# Altium PCB Main PCB.PcbDoc
Units mm, origin at the board's own origin, x right, y up, seen from the top; angles counter-clockwise.
Board outline 152.4 x 101.6 mm, 2 copper layers (Top Layer, Bottom Layer); 19 components, 17 nets, 99 pads, 4 vias.
Unrouted connection lines stored in the file: 3.
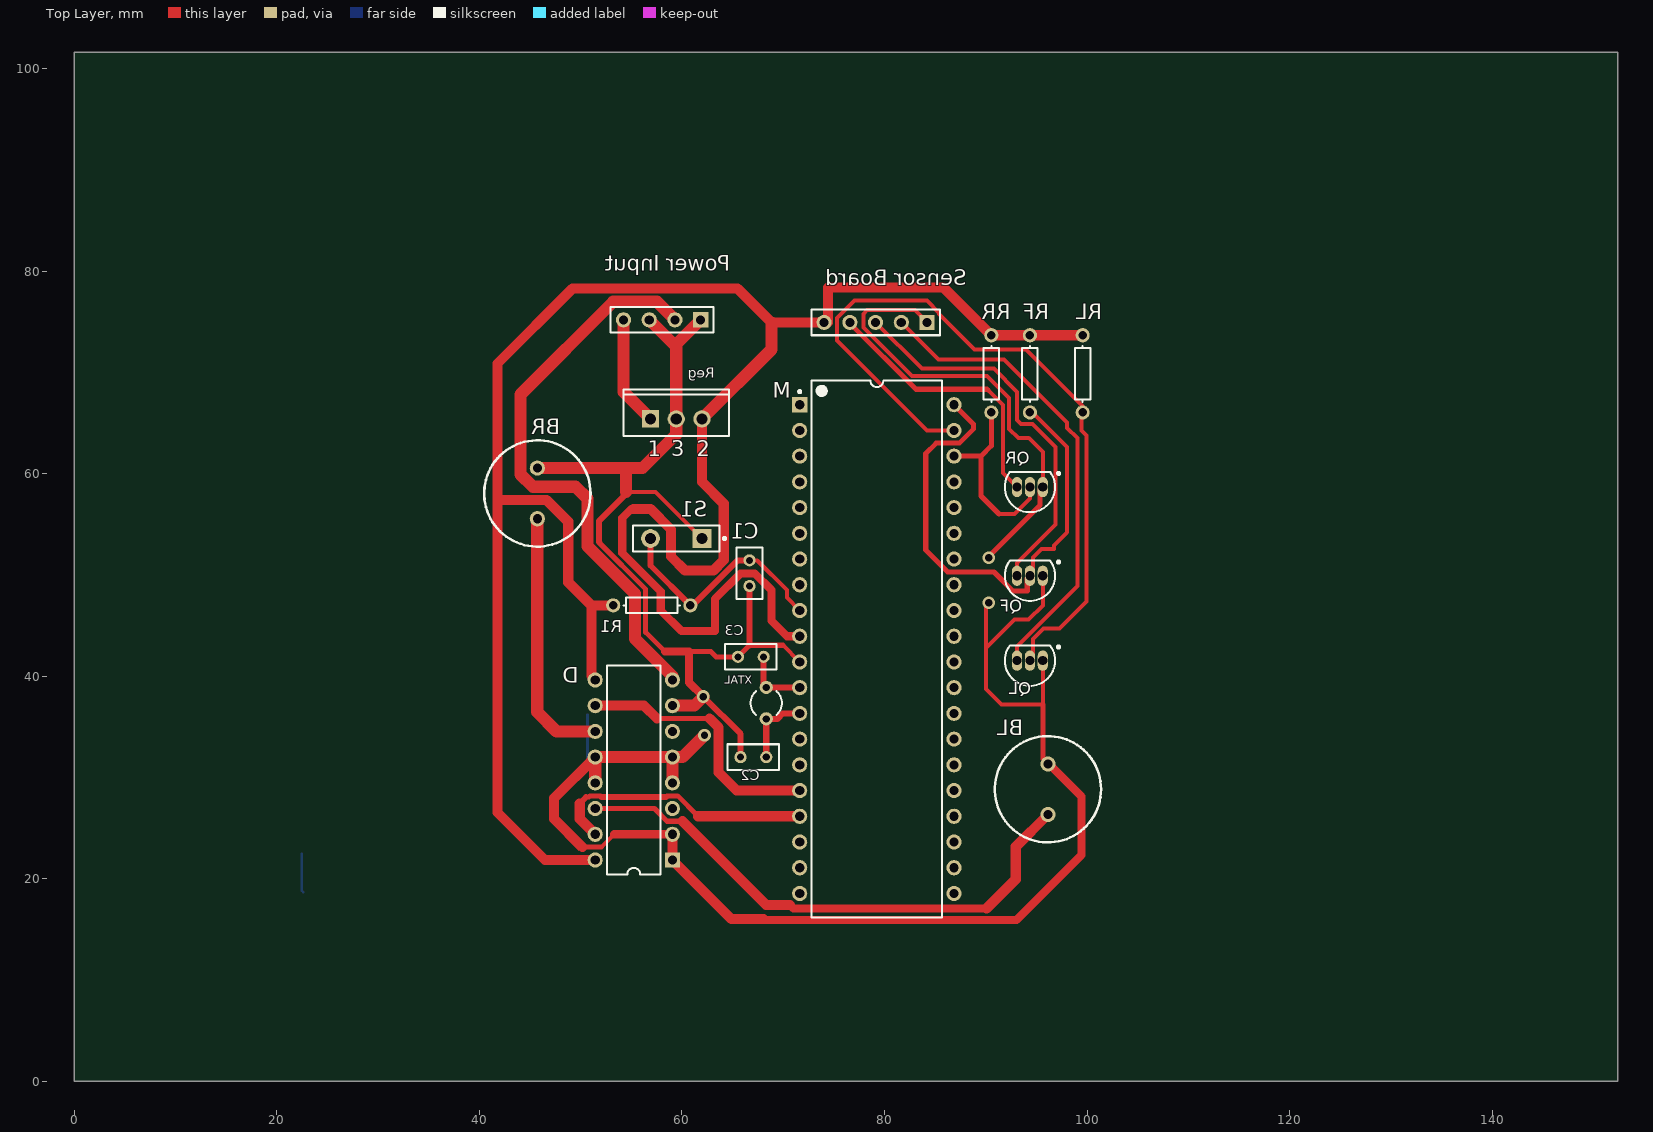
[diagram p0: Top Layer view]
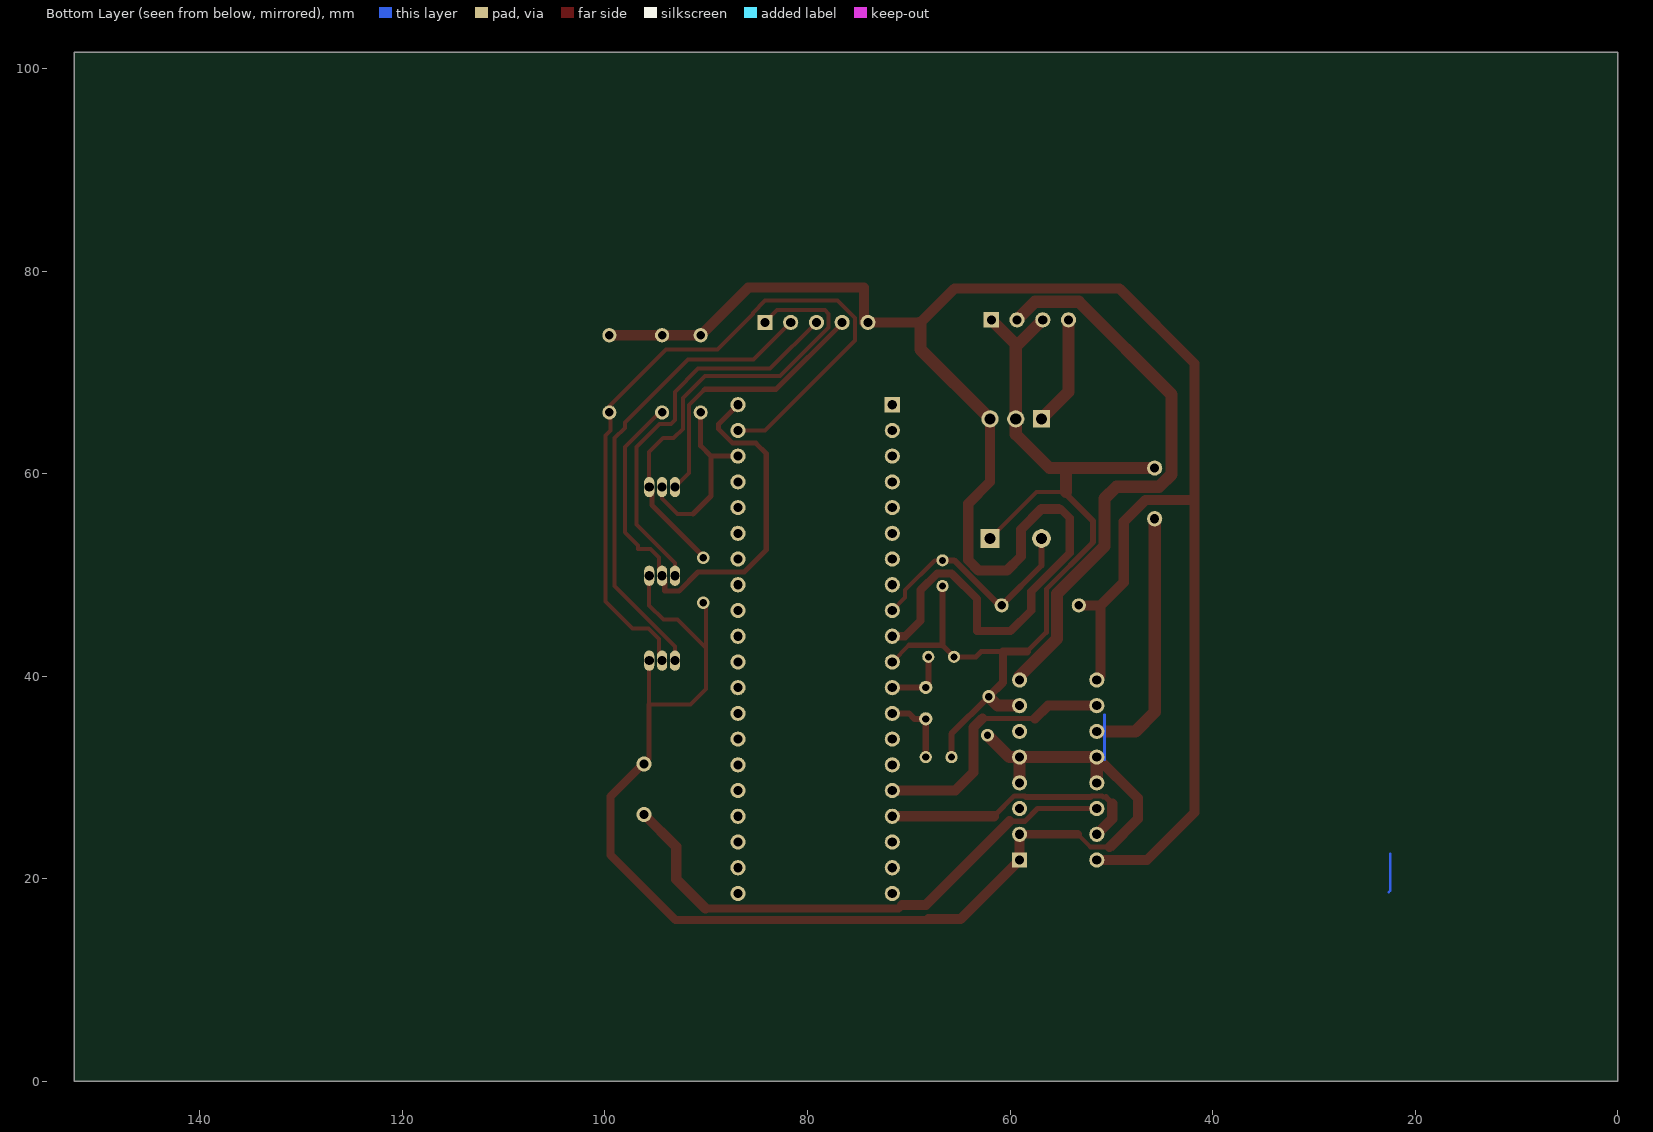
[diagram p1: Bottom Layer view, seen from below]

## Layer stack, top to bottom
Top Solder: solder mask 0.0102, Solder Resist, Dk 3.5
Top Layer: signal copper 0.0356
Dielectric 1: dielectric 0.32, FR-4, Dk 4.8
Bottom Layer: signal copper 0.0356
Bottom Solder: solder mask 0.0102, Solder Resist, Dk 3.5

## Board outline
0,0 152.4,0 152.4,101.6 0,101.6

## Design rules (kind name [scope] priority, off if disabled: settings)
Clearance [All] p1: gap=0.254 ignorepadtopadclearanceinfootprint=FALSE except(0: Arc-Hole Track-Hole SMDPad-Hole THPad-Hole Via-Hole Fill-Hole Poly-Hole Region-Hole Text-Hole; 0.2: Arc-Arc Arc-Track Track-Track)
PolygonConnect [All] p1: connectstyle=Relief reliefconductorwidth=0.254 reliefentries=4 polygonreliefangle="90 Angle" airgapwidth=0.254
RoutingVias [All] p1: holewidth=0.711 width=1.27 viastyle="Through Hole" minholewidth=0.711 minwidth=1.27 maxholewidth=0.711 maxwidth=1.27
SolderMaskExpansion [All] p1: expansion=0.102
Width [All] p1: maxlimit=1.2 minlimit=0.254 preferedwidth=0.8 toplayer_minwidth=0.4 bottomlayer_maxwidth=0.254 bottomlayer_prefwidth=0.254 minimp=50.000000 maximp=50.000000 favimp=50.000000
30 further rules are at their usual default settings.

## Classes and differential pairs
component class "Main Schematic": BR C1 D "Power Input" QF QL R1 Reg RF RL RR S1

## Components (designator, comment, footprint, x,y, rotation, side; value= is the part's Value field where it differs from the comment)
BL "Motor" RB5-10.5 96.139,28.829 r270 top
BR "Motor" RB5-10.5 45.72,58.039 r90 top
C1 "Cap" RAD-0.1 66.675,50.165 r90 top
C2 "Cap" RAD-0.1 67.056,32.004 r0 top
C3 "Cap" RAD-0.1 66.802,41.91 r0 top
D "L293D" DIP16 55.245,30.734 r90 top
M "ATmega16A-PU" 40P6 79.248,42.672 r0 top
"Power Input" "Header 4" HDR1X4 61.849,75.184 r180 top
QF "C945" TO-92A 94.361,49.911 r90 top
QL "C945" TO-92A 94.361,41.529 r90 top
QR "C945" TO-92A 94.361,58.674 r90 top
R1 "Res1" AXIAL-0.3 57.023,46.99 r180 top
Reg "L7805CV" TO220ABN 59.436,65.405 r0 top (schematic designator Regulator)
RF "Res1" AXIAL-0.3 94.361,69.85 r90 top
RL "Res1" AXIAL-0.3 99.568,69.85 r90 top
RR "Res1" AXIAL-0.3 90.551,69.85 r90 top
S1 "SW-PB" SPST-2 59.436,53.594 r180 top
"Sensor Board" "Header 5" HDR1X5 84.201,74.93 r180 top
XTAL "XTAL" R38 68.326,37.338 r180 top

## Footprints (in the part's own frame and the unit in brackets; to place one, negate y for a bottom-side part, rotate by r counter-clockwise, add the part's x,y. Pads: shape width x height; smd on the part's side, far side on the other; paste and mask are expansions set on the pad)
40P6 [mm] "DIP, 40-Leads, Row Spacing 15.24mm, Pitch 2.54mm, Body 52.2x13.95mm"
  rect 1.5x1.5 hole 0.9: 1(-7.62,24.13)
  round 1.5 hole 0.9: 2(-7.62,21.59) 3(-7.62,19.05) 4(-7.62,16.51) 5(-7.62,13.97) 6(-7.62,11.43) 7(-7.62,8.89) 8(-7.62,6.35) 9(-7.62,3.81) 10(-7.62,1.27) 11(-7.62,-1.27) 12(-7.62,-3.81) 13(-7.62,-6.35) 14(-7.62,-8.89) 15(-7.62,-11.43) 16(-7.62,-13.97) 17(-7.62,-16.51) 18(-7.62,-19.05) 19(-7.62,-21.59) 20(-7.62,-24.13) 21(7.62,-24.13) 22(7.62,-21.59) 23(7.62,-19.05) 24(7.62,-16.51) 25(7.62,-13.97) 26(7.62,-11.43) 27(7.62,-8.89) 28(7.62,-6.35) 29(7.62,-3.81) 30(7.62,-1.27) 31(7.62,1.27) 32(7.62,3.81) 33(7.62,6.35) 34(7.62,8.89) 35(7.62,11.43) 36(7.62,13.97) 37(7.62,16.51) 38(7.62,19.05) 39(7.62,21.59) 40(7.62,24.13)
  silkscreen extent -7.74,-26.5 6.45,26.5, body extent -7.05,-26.47 7.05,26.47, height 4.83
AXIAL-0.3 [mm] "Axial Device, Thru-Hole; 2 Leads; 0.3 in Pin Spacing"
  round 1.4 hole 0.85: 1(-3.81,0) 2(3.81,0)
  silkscreen extent -2.77,-0.76 2.77,0.76
DIP16 [mm] "DIP; 16 Leads; Row Spacing 7.62 mm; Pitch 2.54 mm"
  rect 1.5x1.5 hole 0.9: 1(-8.89,-3.81)
  round 1.5 hole 0.9: 2(-6.35,-3.81) 3(-3.81,-3.81) 4(-1.27,-3.81) 5(1.27,-3.81) 6(3.81,-3.81) 7(6.35,-3.81) 8(8.89,-3.81) 9(8.89,3.81) 10(6.35,3.81) 11(3.81,3.81) 12(1.27,3.81) 13(-1.27,3.81) 14(-3.81,3.81) 15(-6.35,3.81) 16(-8.89,3.81)
  silkscreen extent -10.3,-2.65 10.3,2.65
HDR1X4 [mm] "Connector; Header; 4 Position"
  rect 1.5x1.5 hole 0.9: 1(0,0)
  round 1.5 hole 0.9: 2(2.54,0) 3(5.08,0) 4(7.62,0)
  silkscreen extent -1.27,-1.27 8.89,1.27
HDR1X5 [mm] "Connector; Header; 5 Position"
  rect 1.5x1.5 hole 0.9: 1(0,0)
  round 1.5 hole 0.9: 2(2.54,0) 3(5.08,0) 4(7.62,0) 5(10.16,0)
  silkscreen extent -1.27,-1.27 11.43,1.27
R38 [mm] "Crystal, Thru-Hole; 2 Leads; Body 3.1 x 8.2 mm (Dia.xH)"
  round 1.3 hole 0.7: 1(0,1.55) 2(0,-1.55)
  silkscreen extent -1.55,-1.19 1.55,1.17
RAD-0.1 [mm] "Radial Cap, Thru-Hole; 2 Leads; 0.1 in Pin Spacing"
  round 1.2 hole 0.7: 1(-1.27,0) 2(1.27,0)
  silkscreen extent -2.54,-1.27 2.54,1.27
RB5-10.5 [mm] "Capacitor (Radial); 2 Leads"
  round 1.5 hole 0.9: 1(-2.5,0) 2(2.5,0)
  silkscreen extent -5.25,-5.25 5.25,5.25
SPST-2 [mm] "Switch; 2 Leads"
  rect 1.85x1.85 hole 1.1: 1(-2.54,0)
  round 1.85 hole 1.1: 2(2.54,0)
  silkscreen extent -4.89,-1.27 4.28,1.27
TO220ABN [mm] "TO, Thru-Hole, Vertical, Heatsink Mounted; 3 In-Line Leads; Pitch 2.54 mm; Pin sequence 1, 3, 2"
  rect 1.7x1.7 hole 1.1: 1(-2.54,0)
  round 1.7 hole 1.1: 2(2.54,0) 3(0,0)
  silkscreen extent -5.2,-1.7 5.2,2.9
TO-92A [mm] "TO, Flat Index; 3 In-Line, Axial Leads; Body Dia. 4.5mm; Leads 0.51 x 0.48 mm (max)"
  oval 2x1 hole 0.9: 1(0,-1.27) 2(0,0) 3(0,1.27)
  silkscreen extent -2.48,-2.96 1.5,2.48, body extent -2.48,-2.5 1.5,2.5, height 6.86

## Part data
BL BR: "Motor, General Kind"
C1 C2 C3: "Capacitor"
D: "Push-Pull Four Channel Driver With Diode"
M: "8-bit AVR Microcontroller, 16KB Flash, 512 Bytes EEPROM, 1KB SRAM, 40-pin PDIP, Industrial Grade (-40°C to 85°C)"
"Power Input": "Header, 4-Pin"
QF QL QR: library part 2N3904, "NPN General Purpose Amplifier"
R1 RF RL RR: "Resistor"
Reg: "Positive Voltage Regulator"
S1: "Switch"
"Sensor Board": "Header, 5-Pin"
XTAL: "Crystal Oscillator"

## Via types
v1: diameter 1.27, hole 0.711, Top Layer to Bottom Layer, 4 vias

## Nets (pads, with @x,y where several pads share a name; then routed paths per layer and width w, separated by ;. In a path a pad name is that pad's centre, name@x,y a point inside that pad or via, vN(x,y) a via of type N, cw(c..) or ccw(c..) an arc to the next point about the centre after c; other vN are vias at no path point)
+12: "Power Input.2" D.8 | length 56.6
  Top Layer w1.2: D.8 59.055,40.005 55.372,43.688 55.372,48.133 50.673,52.832 50.673,57.531 49.5,58.704 45.287,58.704 44.069,59.922 44.069,67.818 53.213,76.962 57.531,76.962 59.309,75.184
GND: "Power Input.1" "Power Input.3" "Sensor Board.1" BL.1 BR.2 C1.1 C2.1 C3.1 D.1 D.2 D.4 D.5 D.7 D.12 D.13 M.11 QF.1 QL.1 QR.1 Reg.3 S1.1 | length 284.6
  Top Layer w0.254: 59.436,72.517 59.436,72.771
  Top Layer w0.4: 52.042,23.114 53.312,24.384 ; 54.57,58.079 54.483,58.166 57.404,58.166 S1.1 ; 69.977,43.053 M.11 ; 84.201,74.93 82.997,76.134 78.293,76.134 77.917,75.758 77.917,74.431 82.717,69.631 90.135,69.631 92.305,67.461 92.305,64.413 93.218,63.5 94.246,63.5 95.631,62.115 QR.1 ; v1(90.297,47.244) 90.043,46.99 90.043,42.799 ; QL.1 95.631,37.211 91.567,37.211 90.043,38.735 90.043,42.799 ; QF.1 95.631,46.99 94.234,45.593 92.837,45.593 90.043,42.799
  Top Layer w0.5: 50.165,23.114 52.042,23.114 ; 51.816,53.188 56.422,48.582 56.422,44.335 58.339,42.418 ; 60.706,42.418 62.865,42.418 63.373,41.91 C3.1 66.675,43.053 69.977,43.053 ; v1(90.297,51.689) 90.297,51.816 95.365,56.884 95.365,58.408 QR.1 ; 95.631,37.211 95.631,31.837 BL.1
  Top Layer w0.6: 51.845,53.216 51.816,53.245 51.816,55.325 54.57,58.079 ; v1(62.103,37.973) 65.786,34.29 C2.1 ; 66.675,43.053 C1.1
  Top Layer w0.8: 53.312,24.384 D.2 ; 58.339,42.418 60.706,42.418 60.706,39.37 v1(62.103,37.973) ; 68.026,16.002 68.09,15.938 93.027,15.938 99.441,22.352 99.441,28.114 BL.1@96.183,31.373
  Top Layer w1: 50.165,23.114 47.371,25.908 47.371,27.94 D.12 ; D.2 D.1 64.897,16.002 68.026,16.002
  Top Layer w1.2: BR.2 54.483,60.539 ; D.13 D.12 D.5 ; 54.483,58.166 54.483,60.539 ; 56.769,75.184 59.436,72.517 Reg.3 59.436,63.881 56.094,60.539 54.483,60.539 ; D.4 D.5 ; D.7 61.214,37.084 v1(62.103,37.973) ; 59.436,72.771 61.849,75.184 ; v1(62.23,34.163) 60.071,32.004 D.5
  Bottom Layer w0.254: 22.479,22.479 22.479,18.796 22.606,18.669 ; 50.673,31.75 50.673,36.195
NetBL_2: BL.2 D.14 | length 54.5
  Top Layer w0.5: D.14 57.282,26.924 58.536,25.67 60.055,25.67
  Top Layer w0.8: 70.644,17.399 71.005,17.038 90.063,17.038
  Top Layer w1: 60.055,25.67 68.326,17.399 70.644,17.399 ; 90.063,17.038 92.964,19.939 92.964,23.154 BL.2
NetBR_1: BR.1 D.11 | length 25.6
  Top Layer w1.2: BR.1 45.72,36.449 47.625,34.544 D.11
NetC1_2: C1.2 M.9 R1.1 S1.2 | length 23.4
  Top Layer w0.4: C1.2 67.437,51.435 70.358,48.514 70.358,47.752 M.9
  Top Layer w0.6: S1.2 56.896,50.927 R1.1 61.078,46.99 65.523,51.435 C1.2
NetC2_2: C2.2 M.13 XTAL.1 | length 7.3
  Top Layer w0.6: C2.2 XTAL.1 69.443,35.788 69.977,36.322 M.13
NetC3_2: C3.2 M.12 XTAL.2 | length 6.4
  Top Layer w0.254: XTAL.2@68.072,39.142 XTAL.2 ; M.12@71.602,38.888 M.12
  Top Layer w0.6: XTAL.2@68.072,39.142 C3.2 ; XTAL.2 M.12@71.602,38.888
NetD_10: D.10 M.16 | length 26.3
  Top Layer w0.5: 57.531,35.814 62.738,35.814
  Top Layer w1: D.10 56.261,37.084 57.531,35.814 ; 62.738,35.814 63.627,34.925 63.627,30.48 65.405,28.702 M.16
NetD_15: D.15 M.17 | length 26.6
  Top Layer w0.5: 50.546,28.067 50.805,28.067 50.916,28.178 51.954,28.178 52.065,28.067 ; 58.425,28.067 58.536,28.178 59.574,28.178 61.59,26.162
  Top Layer w0.6: 49.911,27.432 50.546,28.067 ; 52.065,28.067 58.425,28.067
  Top Layer w1: 49.911,27.432 49.911,25.908 D.15 ; 61.59,26.162 M.17
NetM_38: M.38 QR.2 RR.1 | length 19.3
  Top Layer w0.254: M.38 M.38@86.868,62.357
  Top Layer w0.4: 91.313,56.007 92.837,56.007 94.361,57.531 QR.2
  Top Layer w0.5: M.38 89.535,61.722 ; RR.1 90.551,62.738 89.535,61.722 ; 91.313,56.007 89.535,57.785 89.535,61.722
NetM_39: M.39 QL.2 RL.1 | length 75.8
  Top Layer w0.254: QL.2 QL.2@94.75,41.529
  Top Layer w0.4: M.39 84.201,64.262 75.311,73.152 75.311,75.363 77.037,77.089 84.184,77.089 85.405,75.868 85.405,75.758 88.9,72.263 93.98,72.263 99.568,66.675 RL.1 99.441,65.913 99.441,64.262 99.949,63.754 99.949,47.371 97.282,44.704 95.718,44.704 94.677,43.663 94.677,41.845 QL.2
NetM_40: M.40 QF.2 RF.1 | length 51.8
  Top Layer w0.4: QF.2 94.677,50.227 94.677,51.717 95.519,52.559 96.755,52.559 96.755,52.917 98.044,54.206 98.044,62.629 94.633,66.04 RF.1
  Top Layer w0.5: M.40 88.768,64.902 88.768,64.389 87.387,63.008 85.106,63.008 84.074,61.976 84.074,52.451 86.249,50.276 90.806,50.276 92.675,48.407 94.095,48.407 94.095,49.645 QF.2
"NetPower Input_4": "Power Input.4" Reg.1 | length 10.9
  Top Layer w1.2: 54.229,75.184 54.229,68.072 Reg.1
NetQF_3: "Sensor Board.3" QF.3 | length 38.8
  Top Layer w0.4: 79.121,74.93 83.693,70.358 90.805,70.358 93.091,68.072 93.091,65.297 93.502,64.886 94.626,64.886 96.901,62.611 96.901,54.991 93.091,51.181 QF.3
NetQL_3: "Sensor Board.2" QL.3 | length 46.9
  Top Layer w0.4: 81.661,74.93 85.344,71.247 91.821,71.247 98.044,65.024 98.044,64.516 99.044,63.516 99.044,48.879 93.091,42.926 QL.3
NetQR_3: "Sensor Board.4" QR.3 | length 27.2
  Top Layer w0.4: 90.222,68.244 91.705,66.761 91.705,60.06 QR.3
  Top Layer w0.5: 76.581,74.93 76.581,74.848 83.103,68.326 90.14,68.326 90.222,68.244
VCC: "Sensor Board.5" D.9 D.16 M.10 R1.2 Reg.2 RF.2 RL.2 RR.2 | length 226.3
  Top Layer w0.5: 54.991,56.515 55.245,56.515
  Top Layer w0.8: 54.991,56.515 54.102,55.626 54.102,52.161 57.912,48.351 57.912,46.482 59.944,44.45 63.246,44.45 63.246,47.625 65.77,50.149 67.194,50.149 68.834,48.509 68.834,45.466 70.358,43.942 M.10
  Top Layer w1: D.16 46.482,21.844 41.783,26.543 41.783,57.531 ; D.9 51.054,40.005 51.054,46.99 ; R1.2 51.054,46.99 ; 55.245,56.515 56.896,56.515 58.928,54.483 58.928,51.816 60.325,50.419 63.092,50.419 64.135,51.462 64.135,57.023 61.976,59.182 Reg.2 ; RL.2 RF.2 RR.2 85.852,78.359 74.411,78.359 74.411,74.93 74.041,74.93 68.834,74.93 65.502,78.262 49.179,78.262 41.783,70.866 41.783,57.531 ; 41.783,57.531 41.91,57.404 46.609,57.404 48.768,55.245 48.768,49.276 51.054,46.99
  Top Layer w1.2: Reg.2 68.834,72.263 68.834,74.93
pads on no net: D.3 D.6 M.1 M.2 M.3 M.4 M.5 M.6 M.7 M.8 M.14 M.15 M.18 M.19 M.20 M.21 M.22 M.23 M.24 M.25 M.26 M.27 M.28 M.29 M.30 M.31 M.32 M.33 M.34 M.35 M.36 M.37

## Text inside footprints (layer, text, board x,y; h text height)
Reg: Top Overlay "3" at 58.936,61.73 h1.5; Top Overlay "2" at 61.476,61.73 h1.5; Top Overlay "1" at 56.646,61.73 h1.5